# Altium PCB PCBAcSensor.PcbDoc
Units mm, origin at the board's own origin, x right, y up, seen from the top; angles counter-clockwise.
Board outline 61.38 x 45 mm, 2 copper layers (Top Layer, Bottom Layer), stack 1.57 mm thick; 29 components, 21 nets, 96 pads, 4 vias.
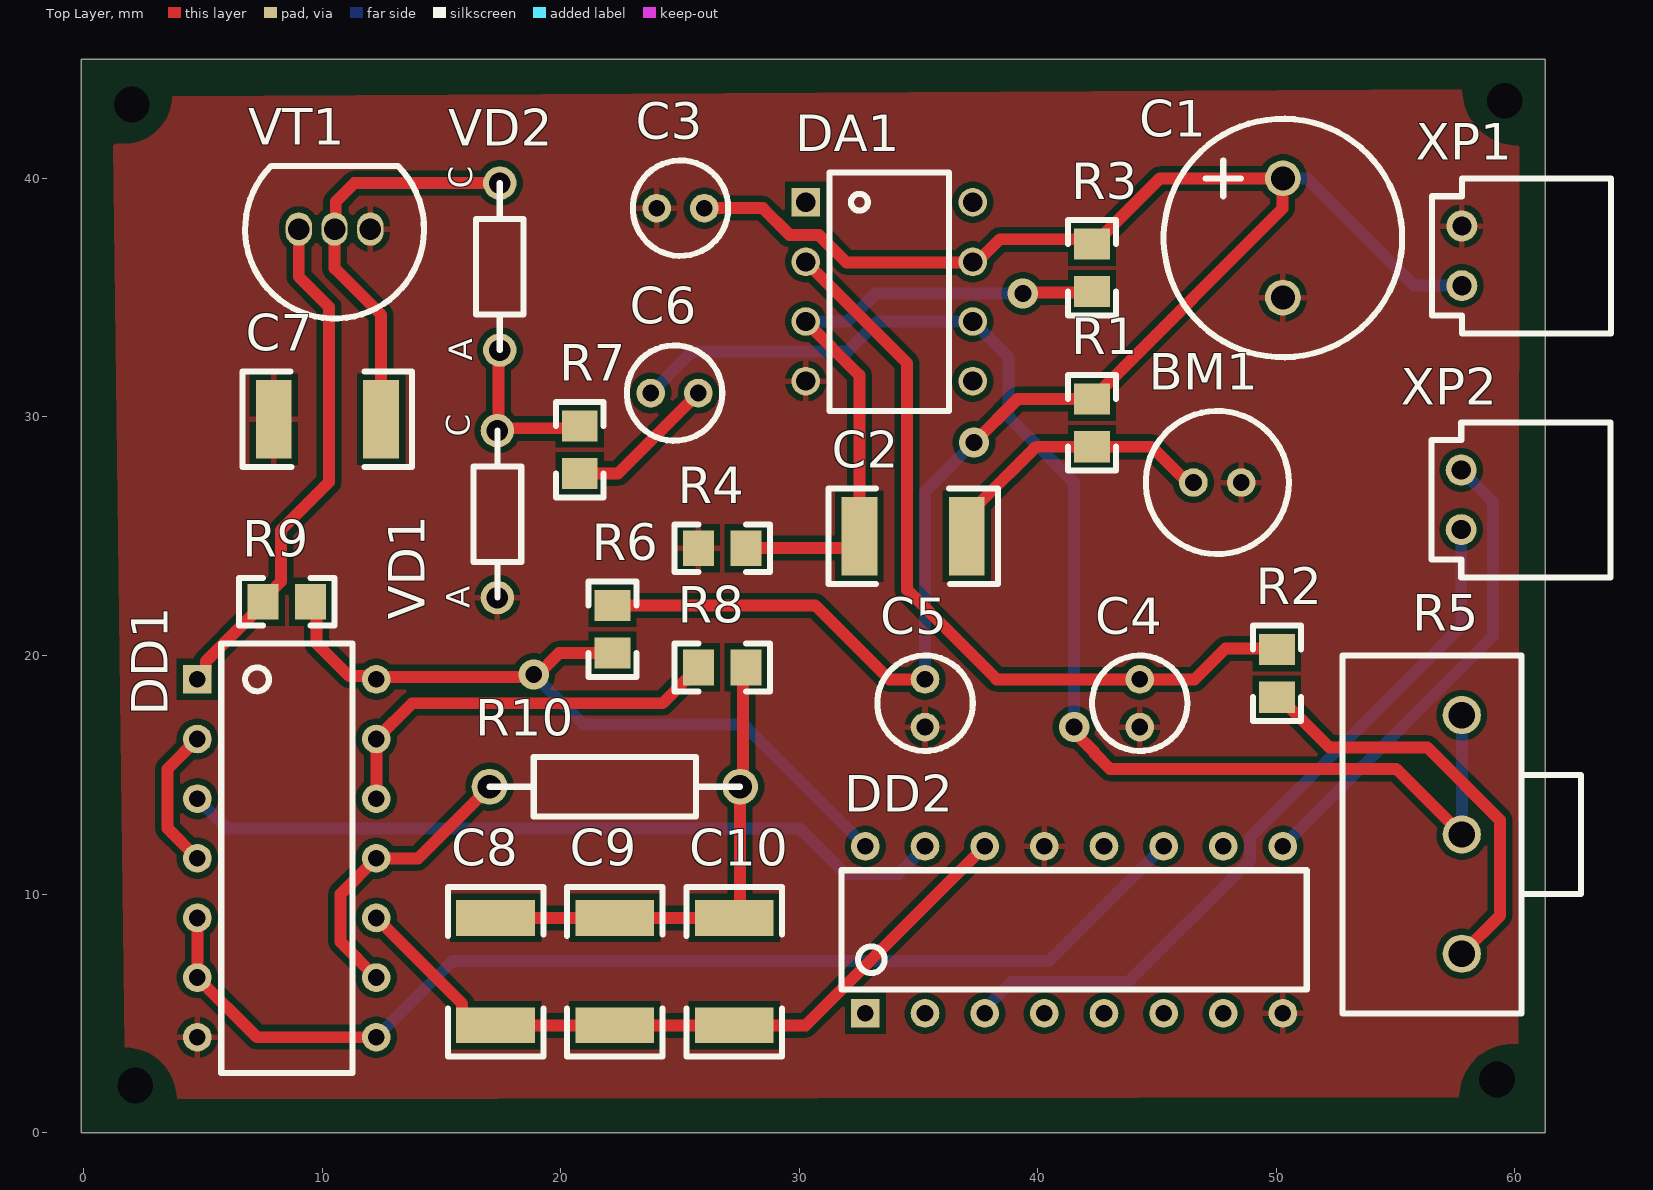
[diagram p0: Top Layer view]
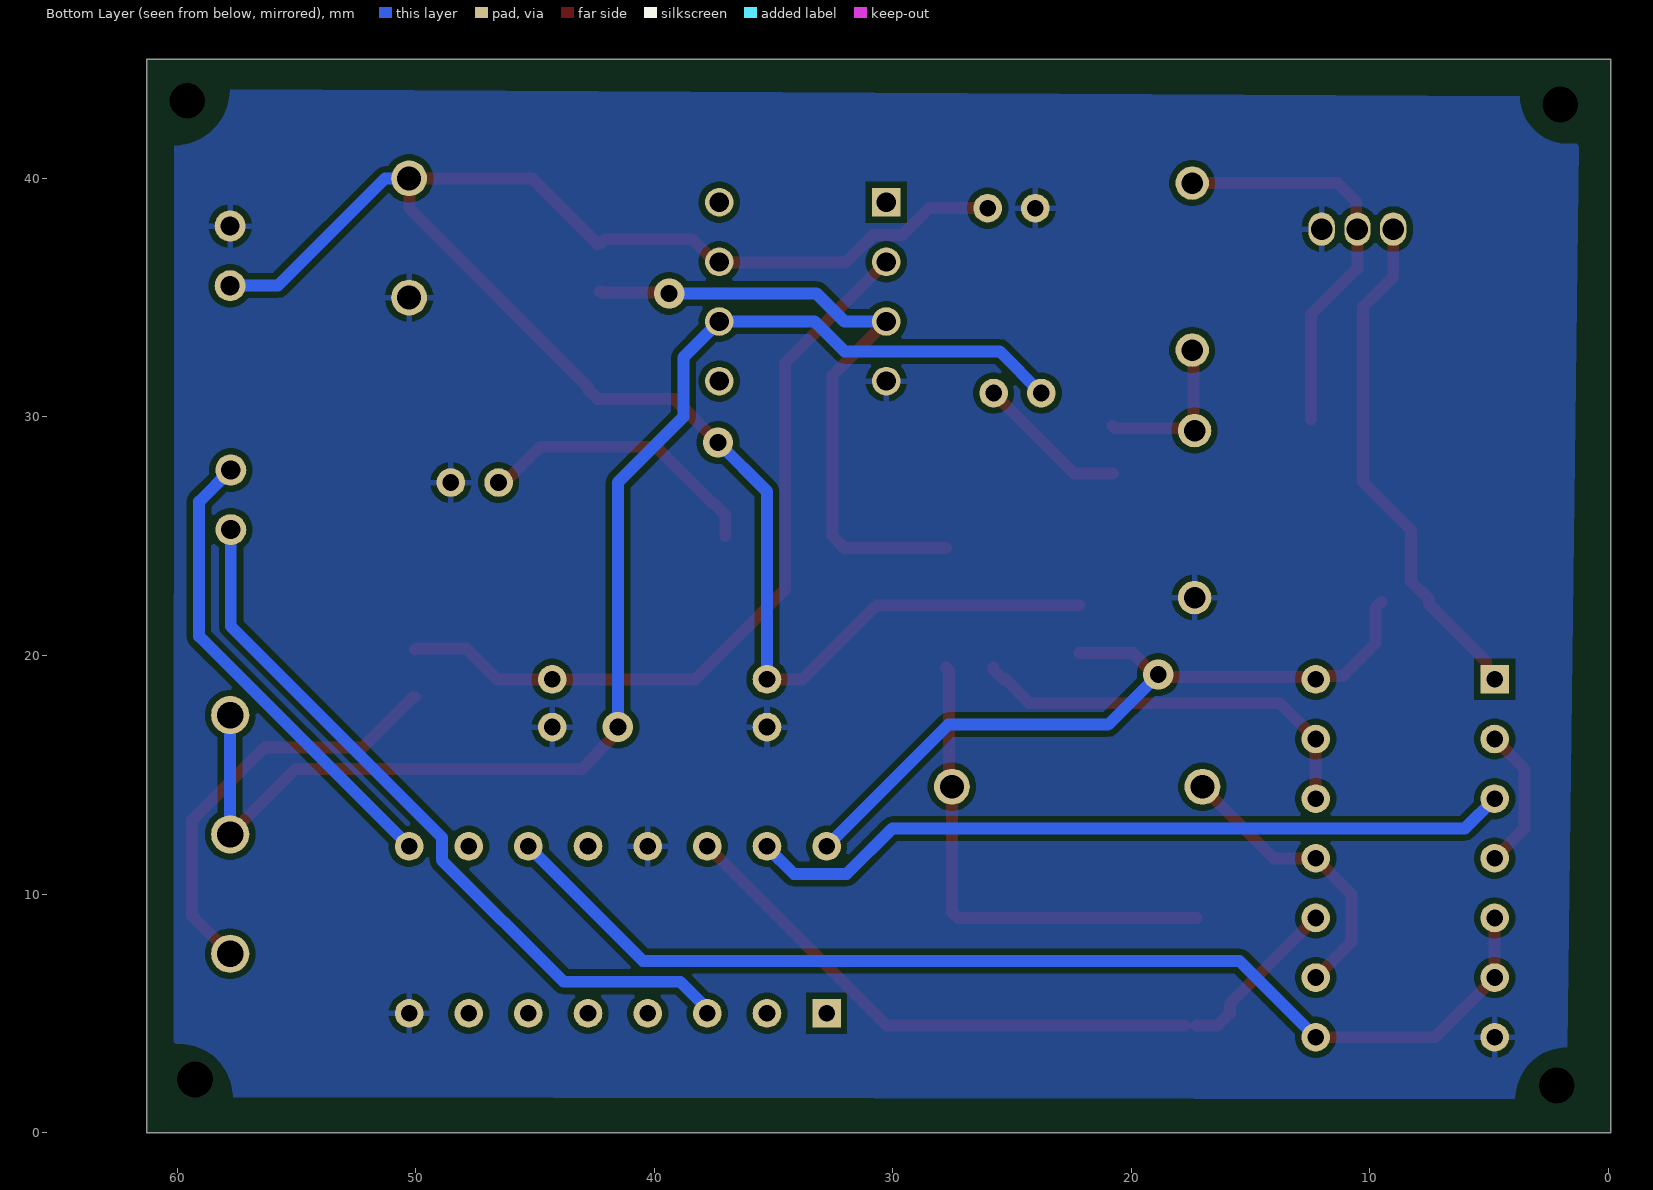
[diagram p1: Bottom Layer view, seen from below]

## Layer stack, top to bottom
Top Solder: solder mask 0.01, Solder Resist, Dk 3.5
Top Layer: signal copper 0.035
Dielectric 1: dielectric 1.5, FR-4, Dk 4.8
Bottom Layer: signal copper 0.035
Bottom Solder: solder mask 0.01, Solder Resist, Dk 3.5

## Board outline
-0.1,0 61.275,0 61.275,45 -0.1,45

## Design rules (kind name [scope] priority, off if disabled: settings)
Clearance [All] p1: gap=0.254 ignorepadtopadclearanceinfootprint=FALSE except(0: Arc-Hole Track-Hole SMDPad-Hole THPad-Hole Via-Hole Fill-Hole Poly-Hole Region-Hole Text-Hole; 0.3: Arc-Arc Arc-Track Track-Track)
PolygonConnect [All] p1: connectstyle=Relief reliefconductorwidth=0.254 reliefentries=4 polygonreliefangle="90 Angle" airgapwidth=0.254
RoutingVias [All] p1: holewidth=0.711 width=1.27 viastyle="Through Hole" minholewidth=0.711 minwidth=1.27 maxholewidth=0.711 maxwidth=1.27
SMDNeckDown [All] p1: percent=50.000
SolderMaskExpansion [All] p1: expansion=0.102 istentingtop=FALSE
Width [All] p1: maxlimit=0.5 minlimit=0.1 preferedwidth=0.25
30 further rules are at their usual default settings.

## Components (designator, comment, footprint, x,y, rotation, side; value= is the part's Value field where it differs from the comment)
BM1 "Micro" electret_micro 47.525,27.25 r180 top
C1 "470 mF" CAPA_Polar 50.275,37.5 r90 top
C2 "Capacitor" CAPA_1206 34.775,25 r180 top
C3 "Capacitor_polar" CAPA_К50-35 25.025,38.75 r0 top
C4 "Capacitor_polar" CAPA_К50-35 44.275,18 r90 top
C5 "Capacitor_polar" CAPA_К50-35 35.275,18 r90 top
C6 "Capacitor_polar" CAPA_К50-35 24.775,31 r180 top
C7 "Capacitor" CAPA_1206 10.225,29.9 r0 top
C8 "Capacitor" CAPA_1206 17.275,6.75 r270 top
C9 "Capacitor" CAPA_1206 22.275,6.75 r270 top
C10 "Capacitor" CAPA_1206 27.275,6.75 r270 top
DA1 "OperationalAmplifire" OPERATION_AMPLIFIRE 30.275,39 r0 top
DD1 "DD1.1" CD4001B_DIP 4.775,19 r0 top
DD2 "CD4017" CB4017B 32.775,5 r90 top
R1 "Res" RES0805 42.275,29.75 r90 top
R2 "Res" RES0805 50.025,19.25 r270 top
R3 "Res" RES0805 42.275,36.25 r90 top
R4 "Res" RES0805 26.775,24.5 r0 top
R5 "Potentiometer" POTENTIOMETER 57.775,7.5 r90 top
R6 "Res" RES0805 22.175,21.1 r90 top
R7 "Res" RES0805 20.8,28.625 r270 top
R8 "Res" RES0805 26.775,19.5 r180 top
R9 "Res" RES0805 8.525,22.25 r0 top
R10 "Res" RES_output 22.275,14.5 r180 top
VD1 "Diod" DIODE 17.35,25.925 r90 top
VD2 "Diod" DIODE 17.45,36.3 r90 top
VT1 "NPN" TRANSISTOR_KT3102 10.525,37.875 r0 top
XP1 "InputOutput" INPUT_OUTPUT_CWF-2R 57.775,36.75 r90 top
XP2 "InputOutput" INPUT_OUTPUT_CWF-2R 57.75,26.525 r90 top

## Footprints (in the part's own frame and the unit in brackets; to place one, negate y for a bottom-side part, rotate by r counter-clockwise, add the part's x,y. Pads: shape width x height; smd on the part's side, far side on the other; paste and mask are expansions set on the pad)
CAPA_1206 [mm]
  rect 1.5x3.3 smd: 1(-2.25,0) 2(2.25,0)
  silkscreen extent -3.55,-2 3.55,2
CAPA_Polar [mm]
  round 1.5 hole 1: 1(-2.5,0) 2(2.5,0)
  silkscreen extent -5,-5 5,5
CAPA_К50-35 [mm]
  round 1.2 hole 0.7: 1(-1,0) 2(1,0)
  silkscreen extent -2,-2 2,2
CB4017B [mm]
  rect 1.2x1.2 hole 0.7: 1(0,0)
  round 1.2 hole 0.7: 2(0,-2.5) 3(0,-5) 4(0,-7.5) 5(0,-10) 6(0,-12.5) 7(0,-15) 8(0,-17.5) 9(7,-17.5) 10(7,-15) 11(7,-12.5) 12(7,-10) 13(7,-7.5) 14(7,-5) 15(7,-2.5) 16(7,0)
  silkscreen extent 1,-18.5 6,1
CD4001B_DIP [mm]
  rect 1.2x1.2 hole 0.7: 1(0,0)
  round 1.2 hole 0.7: 2(0,-2.5) 3(0,-5) 4(0,-7.5) 5(0,-10) 6(0,-12.5) 7(0,-15) 8(7.5,-15) 9(7.5,-12.5) 10(7.5,-10) 11(7.5,-7.5) 12(7.5,-5) 13(7.5,-2.5) 14(7.5,0)
  silkscreen extent 1,-16.5 6.5,1.5
DIODE [mm]
  round 1.4 hole 0.9: 1(-3.5,0) 2(3.5,0)
  silkscreen extent -3.5,-1 3.5,1
electret_micro [mm]
  round 1.2 hole 0.7: 1(-1,0) 2(1,0)
  silkscreen extent -3,-3 3,3
INPUT_OUTPUT_CWF-2R [mm]
  round 1.3 hole 0.8: 1(-1.25,0) 2(1.25,0)
  silkscreen extent -3.25,-6.25 3.25,1.25
OPERATION_AMPLIFIRE [mm]
  rect 1.2x1.2 hole 0.8: 1(0,0)
  round 1.2 hole 0.8: 2(0,-2.5) 3(0,-5) 4(0,-7.5) 5(7,-7.5) 6(7,-5) 7(7,-2.5) 8(7,0)
  silkscreen extent 1,-8.75 6,1.25
POTENTIOMETER [mm]
  round 1.6 hole 1.1: 1(0,0) 2(10,0) 3(5,0)
  silkscreen extent -2.5,-5 12.5,5
RES0805 [mm]
  rect 1.3x1.5 smd: 1(-1,0) 2(1,0)
  silkscreen extent -2,-1 2,1
RES_output [mm]
  round 1.5 hole 1: 1(-5.25,0) 2(5.25,0)
  silkscreen extent -5.25,-1.25 5.25,1.25
TRANSISTOR_KT3102 [mm]
  oval 1.1x1.4 hole 0.9: 1(0,0) 2(-1.5,0) 3(1.5,0)
  silkscreen extent -3.75,-3.75 3.75,2.65

## Part data
C1: library part Capacitor_polar
DD1: library part CD4001B

## Free pads (board coordinates)
  round 1 hole 1.5: 1(2.025,43.1) 1(2.175,1.975) 1(59.25,2.225) 1(59.575,43.25)

## Via types
v1: diameter 1.27, hole 0.711, Top Layer to Bottom Layer, 4 vias

## Nets (pads, with @x,y where several pads share a name; then routed paths per layer and width w, separated by ;. In a path a pad name is that pad's centre, name@x,y a point inside that pad or via, vN(x,y) a via of type N, cw(c..) or ccw(c..) an arc to the next point about the centre after c; other vN are vias at no path point)
GND: BM1.1 C1.1 C3.1 C4.1 C5.1 C7.1 DA1.4 DD1.7 DD2.8 DD2.13 R4.1 VD1.1 VT1.3 XP1.2
NetBM1_2: BM1.2 C2.1 R1.1 | length 12.2
  Top Layer w0.5: C2.1 37.025,25.9 37.525,26.4 37.575,26.4 39.925,28.75 44.775,28.75 46.141,27.384 46.391,27.384 BM1.2
NetC1_2: C1.2 C3.2 C5.2 DA1.7 R1.2 R3.2 R6.2 XP1.1 | length 79.7
  Top Layer w0.5: R6.2 30.675,22.1 33.775,19 C5.2 ; C3.2 28.475,38.75 29.6,37.625 30.825,37.625 31.975,36.475 37.25,36.475 DA1.7 37.464,36.5 38.411,37.446 42.079,37.446 R3.2 42.375,37.25 45.125,40 C1.2 50.25,39.975 50.25,38.725 42.775,31.25 42.775,31.15 42.375,30.75 R1.2 39.15,30.75 v1(37.325,28.925)
  Bottom Layer w0.5: C5.2 35.275,26.875 v1(37.325,28.925) ; C1.2 51.275,40 55.775,35.5 XP1.1
NetC2_2: C2.2 DA1.3 R3.1 R4.2 | length 27.4
  Top Layer w0.5: R4.2 32.025,24.5 C2.2 32.525,31.75 DA1.3 ; v1(39.375,35.175) 39.413,35.213 42.237,35.213 R3.1
  Bottom Layer w0.5: DA1.3 32.025,34 33.2,35.175 v1(39.375,35.175)
NetC4_2: C4.2 DA1.2 R2.1 | length 33.1
  Top Layer w0.5: DA1.2 34.525,32.25 34.525,22.75 38.275,19 C4.2 46.575,19 47.875,20.3 49.975,20.3 R2.1
NetC6_1: C6.1 R7.2 | length 6.4
  Top Layer w0.5: R7.2@20.775,27.625 R7.2 22.4,27.625 C6.1
NetC6_2: C6.2 DA1.6 R5.2 R5.3 | length 56.8
  Top Layer w0.5: v1(41.525,17) 41.525,16.792 42.379,15.937 42.379,15.896 43.025,15.25 55.025,15.25 R5.3
  Bottom Layer w0.5: C6.2 25.525,32.75 32.025,32.75 33.275,34 DA1.6 38.775,32.5 38.775,30 41.525,27.25 v1(41.525,17) ; R5.3 R5.2
NetC7_2: C7.2 VD2.2 VT1.1 | length 17.1
  Top Layer w0.5: C7.2 12.475,34.275 10.525,36.225 VT1.1 10.575,37.925 10.575,39.025 11.35,39.8 VD2.2
NetC8_1: C8.1 C9.1 C10.1 R8.1 R10.1 | length 20.7
  Top Layer w0.5: C8.1 C9.1 C10.1 27.525,9.25 R10.1 27.65,14.625 27.65,19.375 R8.1
NetC8_2: C8.2 C9.2 C10.2 DD1.10 DD2.14 | length 30.7
  Top Layer w0.25: C8.2 C8.2@17.775,4.5
  Top Layer w0.5: DD1.10 15.875,5.4 15.875,5 16.375,4.5 C8.2 ; C8.2@17.775,4.5 C9.2 C10.2 30.275,4.5 DD2.14
NetDD1_1: DD1.1 R9.1 VT1.2 | length 21.7
  Top Layer w0.5: DD1.1 5.125,19.35 5.125,19.75 7.525,22.15 7.525,22.35 8.275,23.1 8.275,25.25 10.3,27.275 10.3,34.6 9.025,35.875 VT1.2
NetDD1_2: DD1.2 DD1.4 | length 6
  Top Layer w0.5: DD1.4 3.525,12.75 3.525,15.25 DD1.2
NetDD1_3: DD1.3 DD2.15 | length 32.3
  Bottom Layer w0.5: DD1.3 6.025,12.75 30.025,12.75 31.931,10.844 34.153,10.844 35.275,11.966 DD2.15
NetDD1_5: DD1.5 DD1.6 DD1.8 DD2.11 | length 47.3
  Top Layer w0.5: DD1.5 DD1.6 7.275,4 DD1.8
  Bottom Layer w0.5: DD1.8 15.475,7.2 40.475,7.2 DD2.11
NetDD1_9: DD1.9 DD1.11 R10.2 | length 12.2
  Top Layer w0.5: DD1.9 10.775,8 10.775,10 DD1.11 14.025,11.5 R10.2
NetDD1_12: DD1.12 DD1.13 R8.2 | length 17.3
  Top Layer w0.5: DD1.12 DD1.13 13.775,18 24.275,18 25.275,19 25.375,19 25.775,19.4 R8.2
NetDD1_14: DD1.14 DD2.16 R6.1 R9.2 | length 32.2
  Top Layer w0.5: R9.2 9.775,22 9.775,20.5 11.141,19.134 12.141,19.134 DD1.14 12.375,19.1 18.775,19.1 v1(18.875,19.2) 19.034,19.2 19.934,20.1 R6.1
  Bottom Layer w0.5: v1(18.875,19.2) 20.975,17.1 27.675,17.1 DD2.16
NetDD2_3: DD2.3 XP2.1 | length 31.4
  Bottom Layer w0.5: DD2.3 37.775,5.189 38.911,6.325 43.8,6.325 48.9,11.425 48.9,12.375 57.75,21.225 XP2.1
NetDD2_9: DD2.9 XP2.2 | length 20
  Bottom Layer w0.5: DD2.9 59.075,20.8 59.075,26.45 XP2.2
NetR2_2: R2.2 R5.1 | length 17.7
  Top Layer w0.5: R2.2 50.125,18.25 52.225,16.15 56.325,16.15 59.375,13.1 59.375,9.1 R5.1
NetR7_1: R7.1 VD1.2 VD2.1 | length 6.9
  Top Layer w0.5: VD1.2 VD1.2@17.4,29.475 ; VD2.1 17.4,32.75 VD1.2@17.4,29.475 ; R7.1 20.7,29.525 17.45,29.525 VD1.2@17.4,29.475
pads on no net: DA1.1 DA1.5 DA1.8 DD2.1 DD2.2 DD2.4 DD2.5 DD2.6 DD2.7 DD2.10 DD2.12

## Polygon pours and split planes (outlines as drawn)
GND on Top Layer "GND_L01_P000" (solid, pour order 0): 3.725,43.45 cw(c1.725,43.45) 1.725,41.45 1.25,41.45 1.725,3.575 1.75,3.575 cw(c1.75,1.4) 3.925,1.4 57.65,1.475 cw(c59.9,1.475) 59.9,3.725 60.15,3.725 60.175,41.375 60.125,41.375 cw(c60.125,43.725) 57.775,43.725
GND on Bottom Layer "GND_L02_P001" (solid, pour order 1): 3.725,43.45 cw(c1.725,43.45) 1.725,41.45 1.34,41.45 ccw(c1.34,41.361) 1.251,41.361 1.251,41.36 1.725,3.575 1.75,3.575 cw(c1.75,1.4) 3.925,1.4 57.65,1.475 cw(c59.9,1.475) 59.9,3.725 60.15,3.725 60.125,41.375 cw(c60.125,43.725) 57.775,43.725

## Silkscreen, mask and mechanical layers (free items; w line width, h text height)
Mechanical 1:
  lines w0.254: 0,0 0,45 61.275,45 61.275,0 0,0

## Text inside footprints (layer, text, board x,y; h text height)
VD1: Top Overlay "C" at 16.196,29.179 h1 r90; Top Overlay "A" at 16.196,21.979 h1 r90
VD2: Top Overlay "C" at 16.296,39.554 h1 r90; Top Overlay "A" at 16.296,32.354 h1 r90